# Altium PCB carrier_board.PcbDoc (part 17 of 18)
Units mm, origin at the board's own origin, x right, y up, seen from the top; angles counter-clockwise.
Board outline 146 x 102 mm, 20 copper layers (F.Cu, F.Mask, B.Cu, B.Mask, In1.Cu, F.SilkS, In2.Cu, B.SilkS, F.Adhes, B.Adhes, F.Paste, B.Paste, Dwgs.User, Cmts.User, Eco1.User, Eco2.User, Edge.Cuts, Margin, B.CrtYd, F.CrtYd); 256 components, 384 nets, 1262 pads, 1024 vias.
Unrouted connection lines stored in the file: 117.
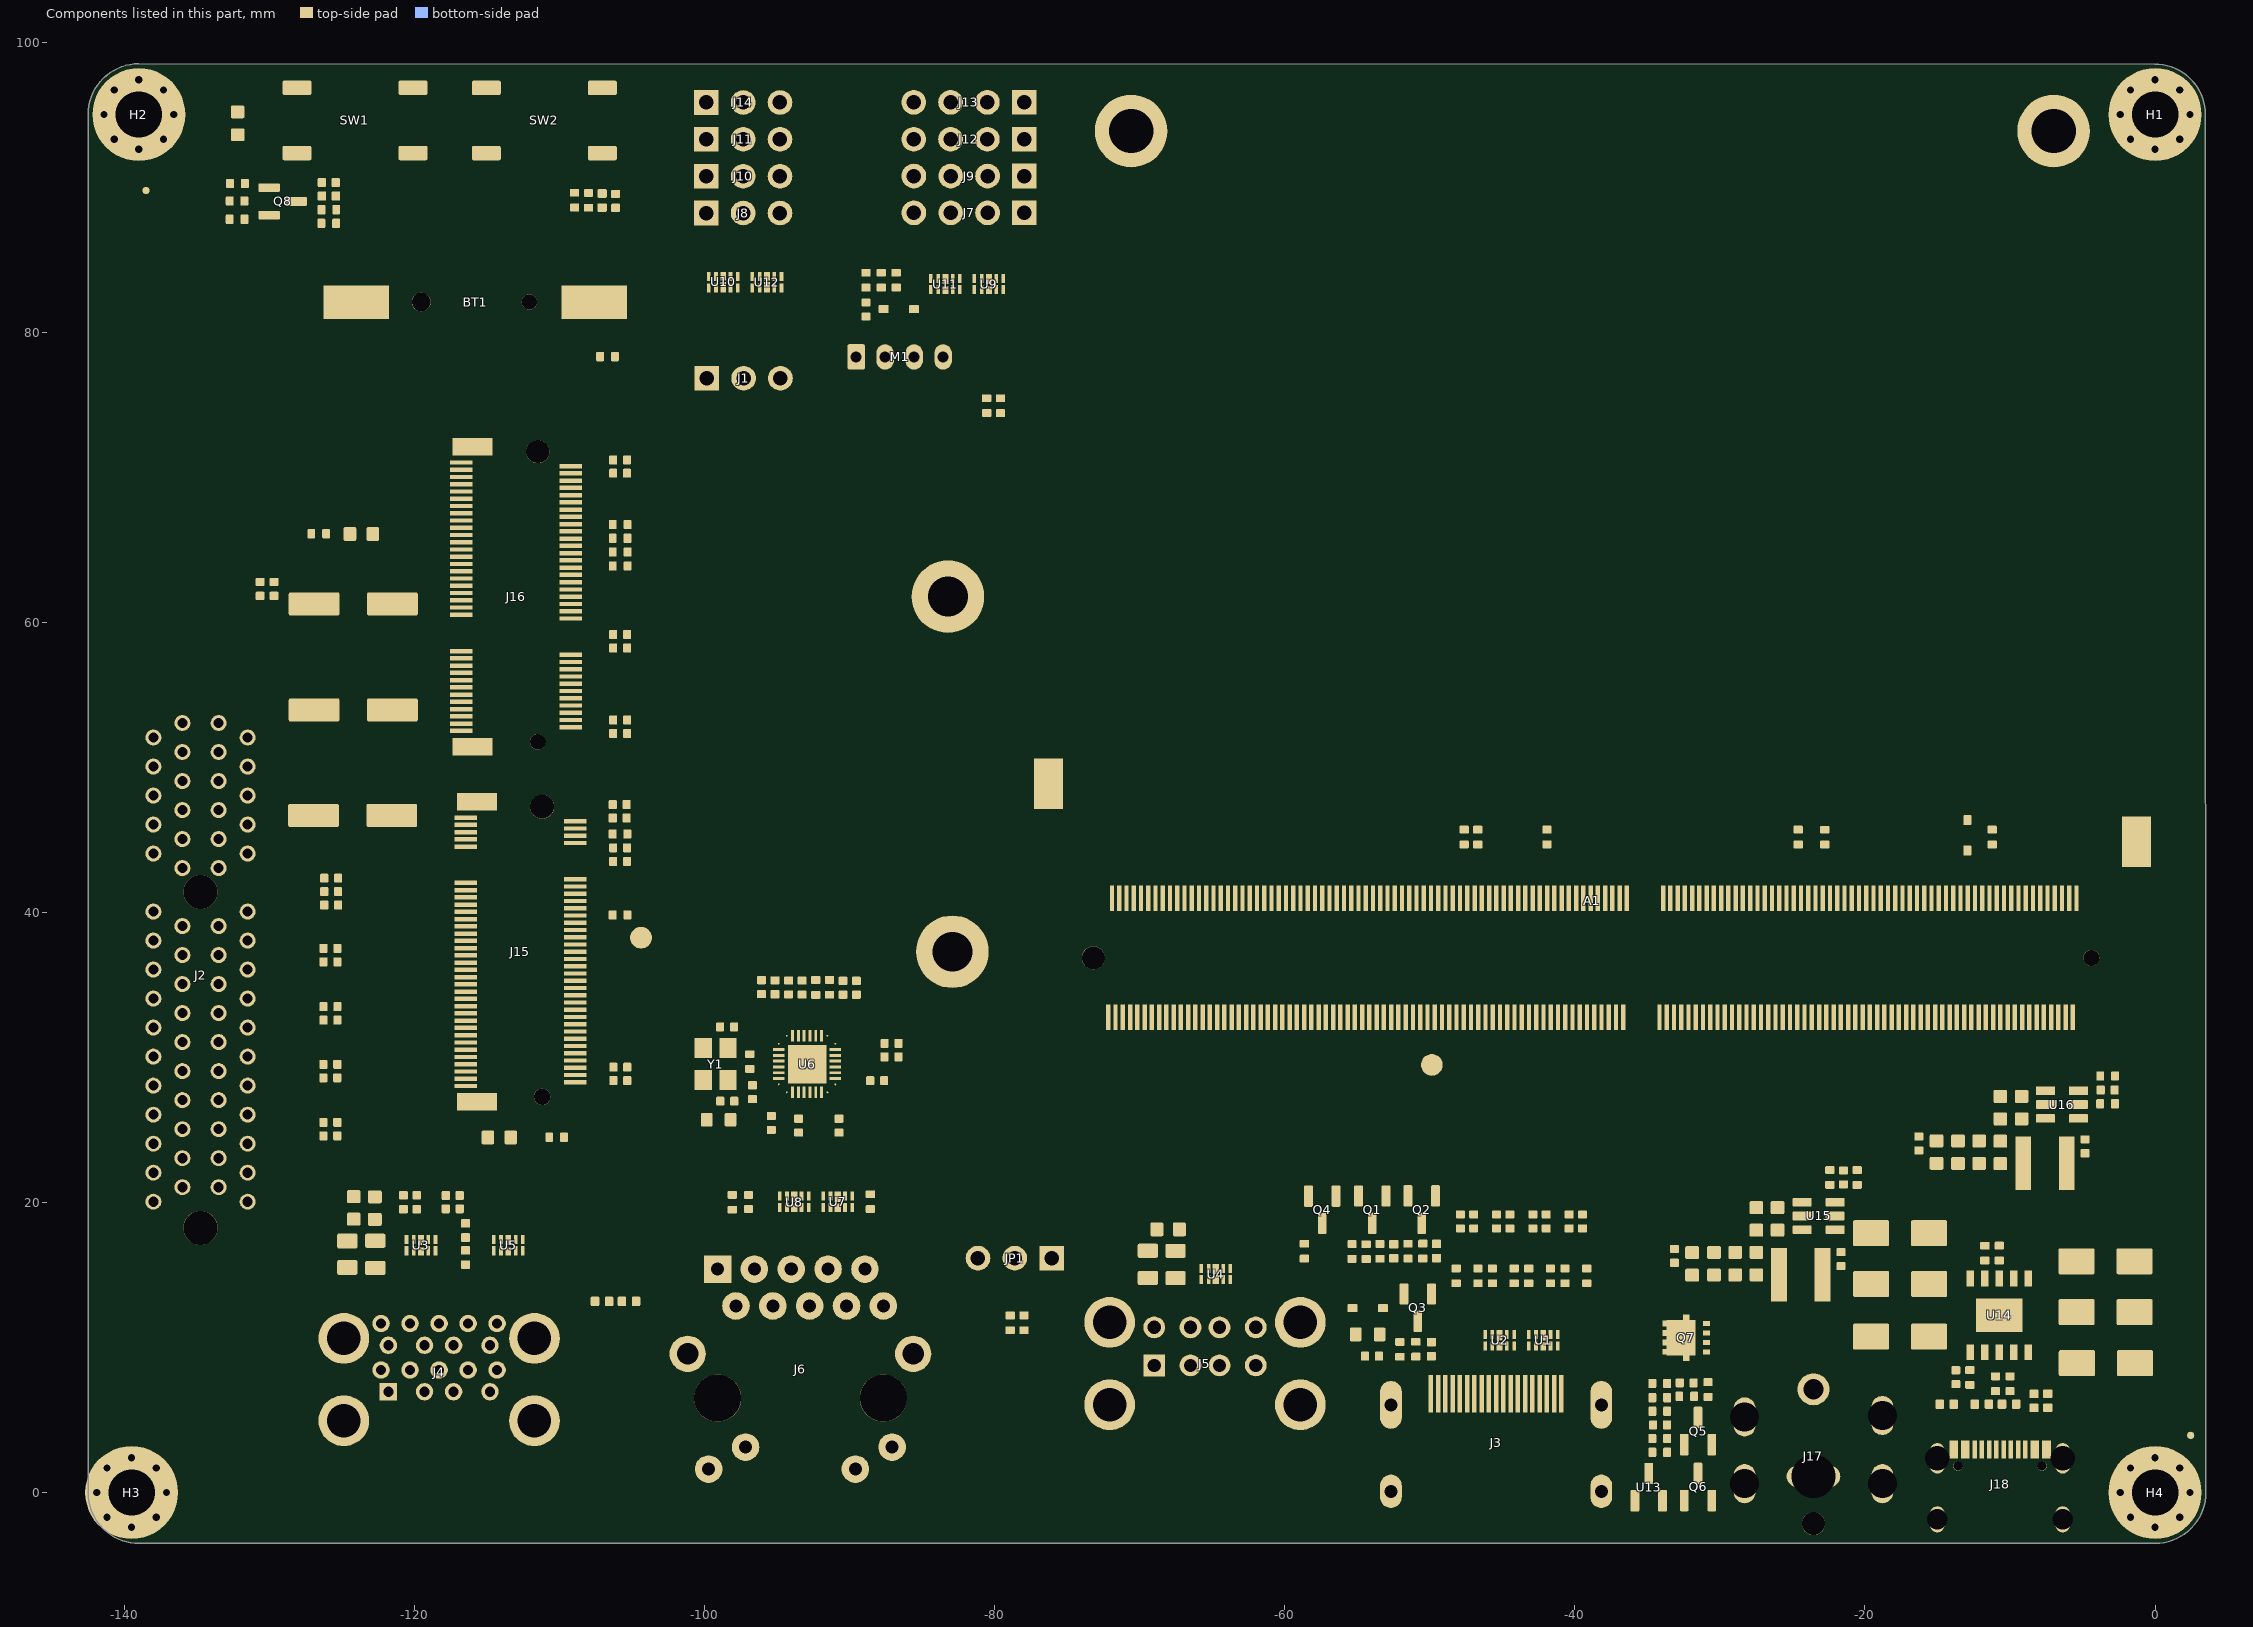
[diagram p27: the components of this part, seen from the top]

## Polygon pours and split planes (outlines as drawn) (continued)
CON_USB3_SSRX_P on F.Cu "F.Cu-/USB2.0&USB3.0/CON_USB3_SSRX_P" (solid, remove dead copper, pour order 32052): -114.331,17.007 -114.347,17.121 -114.363,17.188 -114.393,17.323 -114.405,17.462 -114.53,17.446 -114.578,17.133 -114.549,17.128 -114.528,17.115 -114.506,17.073 -114.501,17.013 -114.501,17.007
Net-(D21-A2) on F.Cu "F.Cu-Net-(D21-A2)" (solid, remove dead copper, pour order 31167): 18 vertices, not listed, extent -128.282,91.433 -127.033,92.341
CON_USB2_D_N on F.Cu "F.Cu-/USB2.0&USB3.0/CON_USB2_D_N" (solid, remove dead copper, pour order 31119): 20 vertices, not listed, extent -66.646,11.236 -65.551,12.26
HSIO_8_TX+ on F.Cu "F.Cu-/LattePanda Module/HSIO_8_TX+" (solid, remove dead copper, pour order 31953): -119.863,29.815 -119.701,29.806 -119.602,29.8 -119.461,29.819 -119.499,30.015 -119.611,30.181 -119.683,30.115 -119.712,30.072 -119.736,30.038 -119.764,30.01 -119.804,29.992 -119.863,29.985
GND on F.Cu "F.Cu-GND-3" (solid, remove dead copper, pour order 31338): -41.33,5.355 -41.332,5.381 -41.331,5.461 -41.315,5.492 -41.28,5.505 -41.43,6.806 -41.58,5.505 -41.557,5.5 -41.541,5.488 -41.527,5.443 -41.528,5.381 -41.53,5.355
Net-(D10-A2) on F.Cu "F.Cu-Net-(D10-A2)" (solid, remove dead copper, pour order 31716): -11.34,2.185 -11.342,2.211 -11.341,2.291 -11.325,2.322 -11.29,2.335 -11.44,2.956 -11.59,2.335 -11.567,2.33 -11.551,2.318 -11.537,2.273 -11.538,2.211 -11.54,2.185
TMDS_CK+ on F.Cu "F.Cu-/HDMI/TMDS_CK+" (solid, remove dead copper, pour order 32098): -45.587,9.673 -45.592,9.705 -45.6,9.766 -45.59,9.789 -45.565,9.797 -45.69,10.111 -45.815,9.797 -45.795,9.793 -45.784,9.78 -45.781,9.738 -45.788,9.705 -45.793,9.673
CON_USB4_D_P on F.Cu "F.Cu-/USB2.0&USB3.0/CON_USB4_D_P" (solid, remove dead copper, pour order 31405): -115.932,17.083 -116.044,17.057 -116.308,16.999 -116.441,16.981 -116.559,16.983 -116.481,16.688 -116.162,16.529 -116.156,16.649 -116.114,16.76 -116.042,16.851 -115.998,16.885 -115.953,16.907 -115.932,16.913
MDI2- on F.Cu "F.Cu-/Gigabit Ethernet/MDI2-" (solid, remove dead copper, pour order 32112): -91.968,27.107 -91.968,27.109 -91.958,27.162 -91.941,27.184 -91.909,27.19 -91.935,27.591 -92.035,27.6 -92.044,27.405 -92.065,27.258 -92.084,27.107
+5V on F.Cu "F.Cu-+5V" (solid, remove dead copper, pour order 31420): -86.59,82.53 -86.596,82.595 -86.605,82.67 -86.603,82.744 -86.578,82.803 -86.554,82.823 -86.52,82.833 -86.79,83.071 -87.06,82.833 -87.029,82.824 -87.006,82.808 -86.98,82.756 -86.976,82.668 -86.984,82.595 -86.99,82.53
TMDS_D2+ on F.Cu "F.Cu-/HDMI/TMDS_D2+" (solid, remove dead copper, pour order 31439): -39.517,13.902 -39.408,14.001 -39.264,14.1 -39.188,14.135 -39.112,14.156 -39.064,14.16 -39.184,14.431 -39.505,14.477 -39.493,14.385 -39.516,14.277 -39.578,14.154 -39.663,14.048
I2C2_SCL on F.Cu "F.Cu-/GPIO/I2C2_SCL" (solid, remove dead copper, pour order 32007): -82.475,82.33 -82.47,82.243 -82.455,82.179 -82.409,82.097 -82.377,82.058 -82.286,81.939 -82.12,82.049 -82.081,82.246 -82.179,82.251 -82.2,82.25 -82.25,82.249 -82.29,82.257 -82.316,82.281 -82.325,82.33
SLS_S3 on F.Cu "F.Cu-/LattePanda Module/SLS_S3" (solid, remove dead copper, pour order 31053): 23 vertices, not listed, extent -82.146,15.164 -80.984,16.326
+3V3 on F.Cu "F.Cu-+3V3-2" (solid, remove dead copper, pour order 31512): -106.86,71.065 -106.738,71.056 -106.667,71.04 -106.602,71.012 -106.564,70.984 -106.536,70.947 -106.523,70.91 -106.299,71.19 -106.523,71.47 -106.554,71.406 -106.618,71.359 -106.722,71.327 -106.86,71.315
+3V3 on F.Cu "F.Cu-+3V3-1" (solid, remove dead copper, pour order 31370): -106.1,52.67 -106.105,52.75 -106.112,52.846 -106.108,52.944 -106.082,53.03 -106.056,53.064 -106.02,53.09 -106.3,53.261 -106.58,53.09 -106.526,53.043 -106.495,52.967 -106.488,52.852 -106.495,52.75 -106.5,52.67
{\C\L\K\R\E\Q\E\}\ on F.Cu "F.Cu-/M.2 E&M Key/~{CLKREQE}" (solid, remove dead copper, pour order 31674): -115.845,65.61 -115.871,65.608 -115.951,65.609 -115.982,65.625 -115.995,65.66 -116.771,65.51 -115.995,65.36 -115.99,65.383 -115.978,65.399 -115.933,65.413 -115.871,65.412 -115.845,65.41
DDC_SCL on F.Cu "F.Cu-/HDMI/DDC_SCL" (solid, remove dead copper, pour order 31254): -50.435,17.535 -50.427,17.655 -50.394,17.795 -50.366,17.85 -50.328,17.895 -50.271,17.928 -50.56,18.573 -50.849,17.928 -50.784,17.888 -50.734,17.813 -50.699,17.697 -50.685,17.535
Net-(J16-SUSCLK) on F.Cu "F.Cu-Net-(J16-SUSCLK)" (solid, remove dead copper, pour order 31616): -106.87,64.66 -106.726,64.65 -106.646,64.631 -106.577,64.599 -106.547,64.572 -106.528,64.538 -106.329,64.84 -106.59,65.074 -106.611,64.995 -106.664,64.932 -106.751,64.884 -106.858,64.86 -106.87,64.86
+3V3 on F.Cu "F.Cu-+3V3" (solid, remove dead copper, pour order 31695): -98.165,21.06 -98.186,20.945 -98.212,20.88 -98.251,20.822 -98.286,20.788 -98.328,20.765 -98.36,20.757 -98.09,20.519 -97.82,20.757 -97.888,20.784 -97.948,20.846 -97.995,20.947 -98.015,21.06
GND on F.Cu "F.Cu-GND-2" (solid, remove dead copper, pour order 31667): -115.845,60.61 -115.871,60.608 -115.951,60.609 -115.982,60.625 -115.995,60.66 -116.771,60.51 -115.995,60.36 -115.99,60.383 -115.978,60.399 -115.933,60.413 -115.871,60.412 -115.845,60.41
TMDS_D0- on F.Cu "F.Cu-/HDMI/TMDS_D0-" (solid, remove dead copper, pour order 32083): -44.793,11.322 -44.788,11.29 -44.78,11.229 -44.79,11.206 -44.815,11.197 -44.69,10.884 -44.565,11.197 -44.585,11.202 -44.596,11.215 -44.599,11.257 -44.592,11.29 -44.587,11.322
HSIO_9_TX+ on F.Cu "F.Cu-/LattePanda Module/HSIO_9_TX+" (solid, remove dead copper, pour order 31945): -120.963,28.415 -120.801,28.406 -120.702,28.4 -120.561,28.419 -120.599,28.615 -120.711,28.781 -120.783,28.715 -120.812,28.672 -120.836,28.638 -120.864,28.61 -120.904,28.592 -120.963,28.585
FAN_1_TAC on F.Cu "F.Cu-/Fan_Temp/FAN_1_TAC" (solid, remove dead copper, pour order 31863): -71.279,42.409 -71.221,42.461 -71.172,42.492 -71.108,42.519 -71.044,42.545 -70.959,42.594 -71.069,42.761 -71.236,42.871 -71.301,42.749 -71.311,42.722 -71.345,42.644 -71.421,42.551
PWR_EN on F.Cu "F.Cu-/PSU/PWR_EN" (solid, remove dead copper, pour order 31884): -78.08,7.756 -78.085,7.686 -78.097,7.634 -78.132,7.562 -78.167,7.497 -78.196,7.399 -78,7.359 -77.804,7.399 -77.846,7.548 -77.87,7.632 -77.88,7.756
DDI_B_TX0+ on F.Cu "F.Cu-/HDMI/DDI_B_TX0+" (solid, remove dead copper, pour order 31454): -39.884,19.683 -39.862,19.612 -39.795,19.37 -39.777,19.248 -39.785,19.142 -39.475,19.169 -39.317,19.45 -39.434,19.463 -39.54,19.511 -39.627,19.588 -39.658,19.635 -39.678,19.68 -39.679,19.683
GND on F.Cu "F.Cu-GND-1" (solid, remove dead copper, pour order 31784): -66.565,34.384 -66.56,34.465 -66.548,34.522 -66.524,34.584 -66.498,34.648 -66.474,34.741 -66.67,34.781 -66.866,34.741 -66.826,34.613 -66.81,34.581 -66.779,34.503 -66.765,34.384
Net-(D9-K) on F.Cu "F.Cu-Net-(D9-K)" (solid, remove dead copper, pour order 31649): -109.845,30.18 -109.819,30.182 -109.739,30.181 -109.708,30.165 -109.695,30.13 -108.919,30.28 -109.695,30.43 -109.7,30.407 -109.712,30.391 -109.757,30.377 -109.819,30.378 -109.845,30.38
CON_USB3_SSTX_N on F.Cu "F.Cu-/USB2.0&USB3.0/CON_USB3_SSTX_N" (solid, remove dead copper, pour order 32044): -120.079,16.232 -120.079,16.238 -120.07,16.312 -120.047,16.344 -120.002,16.358 -120.05,16.671 -120.175,16.687 -120.187,16.548 -120.217,16.413 -120.239,16.316 -120.249,16.232
Net-(U6-CKXTAL1) on F.Cu "F.Cu-Net-(U6-CKXTAL1)" (solid, remove dead copper, pour order 31502): -96.377,29.838 -96.472,29.962 -96.516,30.045 -96.549,30.133 -96.562,30.201 -96.563,30.267 -96.56,30.286 -96.881,30.221 -96.989,29.95 -96.868,29.94 -96.723,29.891 -96.568,29.802 -96.483,29.731
GND on F.Cu "F.Cu-GND" (solid, remove dead copper, pour order 31095): 18 vertices, not listed, extent -62.624,10.147 -61.376,11.383
+3V3 on B.Cu "B.Cu-+3V3-15" (solid, remove dead copper, pour order 30978): -121.67,65.46 -118.39,65.46 -118.39,63.32 -121.67,63.32
HSIO_3_RX+ on B.Cu "B.Cu-/LattePanda Module/HSIO_3_RX+-1" (solid, remove dead copper, pour order 31217): -63.886,42.903 -63.891,42.852 -63.904,42.815 -63.948,42.769 -63.973,42.752 -64.027,42.714 -64.082,42.651 -63.916,42.539 -63.72,42.501 -63.704,42.606 -63.702,42.68 -63.707,42.741 -63.716,42.903
CON_USB3_SSTX_P on B.Cu "B.Cu-/USB2.0&USB3.0/CON_USB3_SSTX_P-1" (solid, remove dead copper, pour order 31034): 18 vertices, not listed, extent -122.417,8.333 -121.47,9.28
PWR_EN on B.Cu "B.Cu-/PSU/PWR_EN-1" (solid, remove dead copper, pour order 31016): 21 vertices, not listed, extent -78.624,5.999 -77.376,7.236
+3V3 on B.Cu "B.Cu-+3V3-14" (solid, remove dead copper, pour order 31175): -53.229,18.249 -53.171,18.301 -53.122,18.332 -53.058,18.359 -52.994,18.385 -52.909,18.434 -53.019,18.601 -53.186,18.711 -53.251,18.589 -53.261,18.562 -53.295,18.484 -53.371,18.391
HSIO_11_RX+ on B.Cu "B.Cu-/LattePanda Module/HSIO_11_RX+-1" (solid, remove dead copper, pour order 31327): -57.716,36.027 -57.707,36.189 -57.701,36.288 -57.72,36.429 -57.916,36.391 -58.082,36.279 -58.016,36.207 -57.973,36.178 -57.939,36.154 -57.911,36.126 -57.893,36.086 -57.886,36.027
Net-(A1-SIO_UART_RX) on B.Cu "B.Cu-Net-(A1-SIO_UART_RX)-1" (solid, remove dead copper, pour order 31106): -73.366,45.1 -73.288,45.095 -73.232,45.083 -73.167,45.057 -73.103,45.029 -73.009,45.004 -72.969,45.2 -73.009,45.396 -73.141,45.355 -73.167,45.343 -73.246,45.313 -73.366,45.3
HSIO_10_RX- on B.Cu "B.Cu-/LattePanda Module/HSIO_10_RX--1" (solid, remove dead copper, pour order 31251): -58.944,36.027 -58.939,36.078 -58.926,36.115 -58.882,36.161 -58.857,36.178 -58.803,36.216 -58.748,36.279 -58.914,36.391 -59.11,36.429 -59.126,36.324 -59.128,36.25 -59.123,36.189 -59.114,36.027
VDC on B.Cu "B.Cu-VDC-1" (solid, remove dead copper, pour order 30995): 17 vertices, not listed, extent -1.624,4.854 -0.167,6.16
CC2 on B.Cu "B.Cu-/PSU/CC2-1" (solid, remove dead copper, pour order 31079): -8.381,13.598 -8.446,13.669 -8.484,13.725 -8.508,13.771 -8.584,13.901 -8.751,13.791 -8.861,13.624 -8.731,13.548 -8.654,13.504 -8.558,13.421
HSIO_0_TX+ on B.Cu "B.Cu-/LattePanda Module/HSIO_0_TX+-1" (solid, remove dead copper, pour order 31271): -118.567,22.141 -118.618,22.146 -118.655,22.159 -118.701,22.203 -118.718,22.228 -118.756,22.282 -118.819,22.337 -118.931,22.171 -118.969,21.975 -118.864,21.959 -118.79,21.957 -118.729,21.962 -118.567,21.971
HSIO_2_TX+ on B.Cu "B.Cu-/LattePanda Module/HSIO_2_TX+-1" (solid, remove dead copper, pour order 31311): -101.103,44.031 -100.941,44.022 -100.842,44.016 -100.701,44.035 -100.739,44.231 -100.851,44.397 -100.923,44.331 -100.952,44.288 -100.976,44.254 -101.004,44.226 -101.044,44.208 -101.103,44.201
+3V3 on B.Cu "B.Cu-+3V3-13" (solid, remove dead copper, pour order 31163): -108.544,87.57 -108.622,87.575 -108.678,87.587 -108.743,87.613 -108.807,87.641 -108.901,87.666 -108.941,87.47 -108.901,87.274 -108.769,87.315 -108.743,87.327 -108.664,87.357 -108.544,87.37
+3V3 on B.Cu "B.Cu-+3V3-12" (solid, remove dead copper, pour order 31201): -79.02,73.909 -79.015,74.002 -79.003,74.066 -78.986,74.118 -78.945,74.266 -79.142,74.306 -79.338,74.266 -79.298,74.148 -79.273,74.103 -79.236,74.027 -79.224,73.977 -79.22,73.909
HSIO_0_TX- on B.Cu "B.Cu-/LattePanda Module/HSIO_0_TX--1" (solid, remove dead copper, pour order 31275): -79.883,21.699 -79.832,21.694 -79.795,21.681 -79.749,21.637 -79.732,21.612 -79.694,21.558 -79.631,21.503 -79.519,21.669 -79.481,21.865 -79.586,21.881 -79.66,21.883 -79.721,21.878 -79.883,21.869
Net-(JP1-C) on B.Cu "B.Cu-Net-(JP1-C)-1" (solid, remove dead copper, pour order 31184): -78.721,13.331 -78.779,13.279 -78.828,13.248 -78.892,13.221 -78.956,13.195 -79.041,13.146 -78.931,12.979 -78.764,12.869 -78.699,12.991 -78.689,13.018 -78.655,13.096 -78.579,13.189
+12VA on B.Cu "B.Cu-+12VA-1" (solid, remove dead copper, pour order 30963): -36.951,20.024 -33.394,20.024 -33.394,22.572 -36.941,22.572 -36.951,22.562
HSIO_9_RX- on B.Cu "B.Cu-/LattePanda Module/HSIO_9_RX--1" (solid, remove dead copper, pour order 31243): -60.444,36.027 -60.439,36.078 -60.426,36.115 -60.382,36.161 -60.357,36.178 -60.303,36.216 -60.248,36.279 -60.414,36.391 -60.61,36.429 -60.626,36.324 -60.628,36.25 -60.623,36.189 -60.614,36.027
HSIO_1_TX+ on B.Cu "B.Cu-/LattePanda Module/HSIO_1_TX+-1" (solid, remove dead copper, pour order 31237): -115.067,20.241 -115.118,20.246 -115.155,20.259 -115.201,20.303 -115.218,20.328 -115.256,20.382 -115.319,20.437 -115.431,20.271 -115.469,20.075 -115.364,20.059 -115.29,20.057 -115.229,20.062 -115.067,20.071
VDC on B.Cu "B.Cu-VDC" (solid, remove dead copper, pour order 30962): -20.86,22.28 -20.04,21.23 -4.81,21.2 -4.81,17.54 -20.899,17.54 -22.694,19.56 -29.07,19.537 -29.07,22.297
HSIO_2_RX- on B.Cu "B.Cu-/LattePanda Module/HSIO_2_RX--1" (solid, remove dead copper, pour order 31313): -99.113,42.831 -98.951,42.822 -98.852,42.816 -98.711,42.835 -98.749,43.031 -98.861,43.197 -98.933,43.131 -98.962,43.088 -98.986,43.054 -99.014,43.026 -99.054,43.008 -99.113,43.001
PWR_EN on B.Cu "B.Cu-/PSU/PWR_EN" (solid, remove dead copper, pour order 31148): -77.9,6.964 -77.895,7.042 -77.883,7.098 -77.857,7.163 -77.829,7.227 -77.804,7.321 -78,7.361 -78.196,7.321 -78.155,7.189 -78.143,7.163 -78.113,7.084 -78.1,6.964
VPullup on B.Cu "B.Cu-VPullup-1" (solid, remove dead copper, pour order 31139): -13.05,47.376 -13.055,47.298 -13.067,47.242 -13.093,47.177 -13.121,47.113 -13.146,47.019 -12.95,46.979 -12.754,47.019 -12.795,47.151 -12.807,47.177 -12.837,47.256 -12.85,47.376
HSIO_1_TX- on B.Cu "B.Cu-/LattePanda Module/HSIO_1_TX--1" (solid, remove dead copper, pour order 31259): -80.863,20.279 -80.812,20.274 -80.775,20.261 -80.729,20.217 -80.712,20.192 -80.674,20.138 -80.611,20.083 -80.499,20.249 -80.461,20.445 -80.566,20.461 -80.64,20.463 -80.701,20.458 -80.863,20.449
HPD on B.Cu "B.Cu-/HDMI/HPD-1" (solid, remove dead copper, pour order 31157): -52.86,15.064 -52.855,15.142 -52.843,15.198 -52.817,15.263 -52.789,15.327 -52.764,15.421 -52.96,15.461 -53.156,15.421 -53.115,15.289 -53.103,15.263 -53.073,15.184 -53.06,15.064
+5V on B.Cu "B.Cu-+5V-1" (solid, remove dead copper, pour order 30965): -33.033,15.1 -29.27,15.1 -29.27,13.952 -29.28,13.95 -32.89,13.95 -33.05,14.11 -33.05,15.01
SOC_UART2_RX on B.Cu "B.Cu-/GPIO/SOC_UART2_RX-1" (solid, remove dead copper, pour order 31357): -84.856,79.585 -84.788,79.58 -84.737,79.568 -84.663,79.53 -84.598,79.494 -84.499,79.464 -84.459,79.66 -84.499,79.856 -84.615,79.817 -84.663,79.79 -84.738,79.751 -84.789,79.739 -84.856,79.735
CON_USB3_SSRX_P on B.Cu "B.Cu-/USB2.0&USB3.0/CON_USB3_SSRX_P-1" (solid, remove dead copper, pour order 31040): 17 vertices, not listed, extent -116.417,8.333 -115.642,9.239
HSIO_11_TX- on B.Cu "B.Cu-/LattePanda Module/HSIO_11_TX-" (solid, remove dead copper, pour order 31257): -58.194,28.917 -58.189,28.968 -58.176,29.005 -58.132,29.051 -58.107,29.068 -58.053,29.106 -57.998,29.169 -58.164,29.281 -58.36,29.319 -58.376,29.214 -58.378,29.14 -58.373,29.079 -58.364,28.917
{\W\A\K\E\}\ on B.Cu "B.Cu-/~{WAKE}-3" (solid, remove dead copper, pour order 31121): -111.201,42.249 -111.149,42.191 -111.118,42.142 -111.091,42.078 -111.065,42.014 -111.016,41.929 -110.849,42.039 -110.739,42.206 -110.861,42.271 -110.888,42.281 -110.966,42.315 -111.059,42.391
FAN_1_PWM on B.Cu "B.Cu-/Fan_Temp/FAN_1_PWM-1" (solid, remove dead copper, pour order 31022): 20 vertices, not listed, extent -79.417,74.992 -78.264,76.001
SOC_UART2_RX on B.Cu "B.Cu-/GPIO/SOC_UART2_RX" (solid, remove dead copper, pour order 31359): -97.857,80.643 -97.902,80.695 -97.929,80.739 -97.955,80.818 -97.975,80.89 -98.024,80.981 -98.191,80.871 -98.301,80.704 -98.191,80.649 -98.138,80.635 -98.058,80.608 -98.014,80.581 -97.963,80.537
REFCLK2- on B.Cu "B.Cu-/LattePanda Module/REFCLK2--1" (solid, remove dead copper, pour order 31211): -46.843,35.899 -46.792,35.894 -46.755,35.881 -46.709,35.837 -46.692,35.812 -46.654,35.758 -46.591,35.703 -46.479,35.869 -46.441,36.065 -46.546,36.081 -46.62,36.083 -46.681,36.078 -46.843,36.069
FAN_1_TAC on B.Cu "B.Cu-/Fan_Temp/FAN_1_TAC-2" (solid, remove dead copper, pour order 31070): -86.391,82.37 -86.55,82.364 -86.675,82.342 -86.756,82.326 -86.611,81.59 -86.193,82.214 -86.249,82.23 -86.337,82.22 -86.387,82.203 -86.415,82.184 -86.415,82.175 -86.398,82.17 -86.391,82.17
HSIO_9_RX- on B.Cu "B.Cu-/LattePanda Module/HSIO_9_RX-" (solid, remove dead copper, pour order 31067): -132.3,30.14 -132.206,30.047 -132.087,29.924 -131.957,29.744 -131.499,30.049 -131.806,30.507 -131.891,30.431 -131.966,30.33 -132.014,30.264 -132.061,30.222 -132.087,30.213 -132.114,30.216 -132.18,30.26
HSIO_9_RX+ on B.Cu "B.Cu-/LattePanda Module/HSIO_9_RX+-1" (solid, remove dead copper, pour order 31323): -60.716,36.027 -60.707,36.189 -60.701,36.288 -60.72,36.429 -60.916,36.391 -61.082,36.279 -61.016,36.207 -60.973,36.178 -60.939,36.154 -60.911,36.126 -60.893,36.086 -60.886,36.027
+12V on B.Cu "B.Cu-+12V-3" (solid, remove dead copper, pour order 31004): -23.05,8.799 -23.065,9.125 -23.075,9.229 -23.088,9.356 -23.091,9.487 -23.079,9.645 -23.044,9.854 -23.78,10.001 -24.404,9.583 -24.243,9.365 -24.158,9.251 -24.098,9.139 -24.062,8.999 -24.05,8.799
+3V3 on B.Cu "B.Cu-+3V3-11" (solid, remove dead copper, pour order 31124): -49.951,18.529 -49.899,18.471 -49.868,18.422 -49.841,18.358 -49.815,18.294 -49.766,18.209 -49.599,18.319 -49.489,18.486 -49.611,18.551 -49.638,18.561 -49.716,18.595 -49.809,18.671
+3V3 on B.Cu "B.Cu-+3V3-10" (solid, remove dead copper, pour order 31181): -23.557,30.222 -23.615,30.17 -23.664,30.139 -23.728,30.112 -23.792,30.086 -23.877,30.037 -23.767,29.87 -23.6,29.76 -23.535,29.882 -23.525,29.909 -23.491,29.987 -23.415,30.08
HSIO_3_RX+ on B.Cu "B.Cu-/LattePanda Module/HSIO_3_RX+" (solid, remove dead copper, pour order 31291): -76.477,56.309 -76.639,56.318 -76.738,56.324 -76.879,56.305 -76.841,56.109 -76.729,55.943 -76.657,56.009 -76.628,56.052 -76.604,56.086 -76.576,56.114 -76.536,56.132 -76.477,56.139
REFCLK0- on B.Cu "B.Cu-/LattePanda Module/REFCLK0--1" (solid, remove dead copper, pour order 31349): -49.153,39.165 -49.274,39.057 -49.347,38.991 -49.434,38.879 -49.268,38.767 -49.071,38.729 -49.068,38.826 -49.077,38.877 -49.085,38.918 -49.084,38.958 -49.069,38.999 -49.032,39.045
REFCLK2+ on B.Cu "B.Cu-/LattePanda Module/REFCLK2+-1" (solid, remove dead copper, pour order 31233): -119.717,39.135 -119.768,39.14 -119.805,39.153 -119.851,39.197 -119.868,39.222 -119.906,39.276 -119.969,39.331 -120.081,39.165 -120.119,38.969 -120.014,38.953 -119.94,38.951 -119.879,38.956 -119.717,38.965
HSIO_2_RX+ on B.Cu "B.Cu-/LattePanda Module/HSIO_2_RX+-1" (solid, remove dead copper, pour order 31307): -112.673,38.331 -112.511,38.322 -112.412,38.316 -112.271,38.335 -112.309,38.531 -112.421,38.697 -112.493,38.631 -112.522,38.588 -112.546,38.554 -112.574,38.526 -112.614,38.508 -112.673,38.501
DDI_B_HPD on B.Cu "B.Cu-/HDMI/DDI_B_HPD-1" (solid, remove dead copper, pour order 31085): -30.224,30.915 -30.304,30.919 -30.362,30.931 -30.424,30.956 -30.488,30.981 -30.581,31.006 -30.621,30.81 -30.581,30.614 -30.446,30.655 -30.424,30.664 -30.345,30.693 -30.224,30.705
CON_USB4_D_N on B.Cu "B.Cu-/USB2.0&USB3.0/CON_USB4_D_N-1" (solid, remove dead copper, pour order 31375): -115.245,17.349 -115.269,17.332 -115.288,17.332 -115.313,17.362 -115.332,17.407 -115.374,17.496 -115.541,17.384 -115.501,17.188 -115.396,17.193 -115.323,17.179 -115.274,17.169 -115.228,17.168 -115.18,17.185 -115.125,17.228
{\P\L\T\_\R\S\T\}\ on B.Cu "B.Cu-/~{PLT_RST}-1" (solid, remove dead copper, pour order 31049): 18 vertices, not listed, extent -133.607,42.244 -132.694,43.157
+3V3 on B.Cu "B.Cu-+3V3-9" (solid, remove dead copper, pour order 31197): -131.329,90.881 -131.381,90.939 -131.412,90.988 -131.439,91.052 -131.465,91.116 -131.514,91.201 -131.681,91.091 -131.791,90.924 -131.669,90.859 -131.642,90.849 -131.564,90.815 -131.471,90.739
REFCLK0+ on B.Cu "B.Cu-/LattePanda Module/REFCLK0+-1" (solid, remove dead copper, pour order 31345): -59.827,48.129 -59.989,48.138 -60.088,48.144 -60.229,48.125 -60.191,47.929 -60.079,47.763 -60.007,47.829 -59.978,47.872 -59.954,47.906 -59.926,47.934 -59.886,47.952 -59.827,47.959
CON_USB3_SSTX_N on B.Cu "B.Cu-/USB2.0&USB3.0/CON_USB3_SSTX_N-1" (solid, remove dead copper, pour order 31031): 22 vertices, not listed, extent -120.888,8.449 -119.967,9.448
FAN_1_PWM on B.Cu "B.Cu-/Fan_Temp/FAN_1_PWM" (solid, remove dead copper, pour order 31127): -78.55,74.806 -78.555,74.728 -78.567,74.672 -78.593,74.607 -78.621,74.543 -78.646,74.449 -78.45,74.409 -78.254,74.449 -78.295,74.581 -78.307,74.607 -78.337,74.686 -78.35,74.806
GbE_PCIe_RX- on B.Cu "B.Cu-/Gigabit Ethernet/GbE_PCIe_RX--1" (solid, remove dead copper, pour order 31331): -80.441,44.257 -80.432,44.419 -80.426,44.518 -80.445,44.659 -80.641,44.621 -80.807,44.509 -80.741,44.437 -80.698,44.408 -80.664,44.384 -80.636,44.356 -80.618,44.316 -80.611,44.257
HSIO_0_TX+ on B.Cu "B.Cu-/LattePanda Module/HSIO_0_TX+" (solid, remove dead copper, pour order 31351): -79.883,21.971 -79.721,21.962 -79.622,21.956 -79.481,21.975 -79.519,22.171 -79.631,22.337 -79.703,22.271 -79.732,22.228 -79.756,22.194 -79.784,22.166 -79.824,22.148 -79.883,22.141
HSIO_0_TX- on B.Cu "B.Cu-/LattePanda Module/HSIO_0_TX-" (solid, remove dead copper, pour order 31343): -118.567,21.869 -118.729,21.878 -118.828,21.884 -118.969,21.865 -118.931,21.669 -118.819,21.503 -118.747,21.569 -118.718,21.612 -118.694,21.646 -118.666,21.674 -118.626,21.692 -118.567,21.699
HSIO_3_RX- on B.Cu "B.Cu-/LattePanda Module/HSIO_3_RX--1" (solid, remove dead copper, pour order 31277): -63.614,42.903 -63.623,42.741 -63.629,42.642 -63.61,42.501 -63.414,42.539 -63.248,42.651 -63.314,42.723 -63.357,42.752 -63.391,42.776 -63.419,42.804 -63.437,42.844 -63.444,42.903
{\P\L\T\_\R\S\T\}\ on B.Cu "B.Cu-/~{PLT_RST}" (solid, remove dead copper, pour order 31118): -111.691,41.409 -111.639,41.351 -111.608,41.302 -111.581,41.238 -111.555,41.174 -111.506,41.089 -111.339,41.199 -111.229,41.366 -111.351,41.431 -111.378,41.441 -111.456,41.475 -111.549,41.551
GbE_PCIe_RX+ on B.Cu "B.Cu-/Gigabit Ethernet/GbE_PCIe_RX+-1" (solid, remove dead copper, pour order 31249): -80.169,44.257 -80.164,44.308 -80.151,44.345 -80.107,44.391 -80.082,44.408 -80.028,44.446 -79.973,44.509 -80.139,44.621 -80.335,44.659 -80.351,44.554 -80.353,44.48 -80.348,44.419 -80.339,44.257
HSIO_11_RX- on B.Cu "B.Cu-/LattePanda Module/HSIO_11_RX--1" (solid, remove dead copper, pour order 31245): -57.444,36.027 -57.439,36.078 -57.426,36.115 -57.382,36.161 -57.357,36.178 -57.303,36.216 -57.248,36.279 -57.414,36.391 -57.61,36.429 -57.626,36.324 -57.628,36.25 -57.623,36.189 -57.614,36.027
Net-(Q7-G) on B.Cu "B.Cu-Net-(Q7-G)-1" (solid, remove dead copper, pour order 31130): -31.911,8.596 -31.916,8.518 -31.928,8.462 -31.954,8.397 -31.982,8.333 -32.007,8.239 -31.811,8.199 -31.615,8.239 -31.656,8.371 -31.668,8.397 -31.698,8.476 -31.711,8.596
HSIO_10_TX+ on B.Cu "B.Cu-/LattePanda Module/HSIO_10_TX+-1" (solid, remove dead copper, pour order 31329): -59.966,28.917 -59.957,29.079 -59.951,29.178 -59.97,29.319 -60.166,29.281 -60.332,29.169 -60.266,29.097 -60.223,29.068 -60.189,29.044 -60.161,29.016 -60.143,28.976 -60.136,28.917
HSIO_3_TX+ on B.Cu "B.Cu-/LattePanda Module/HSIO_3_TX+-1" (solid, remove dead copper, pour order 31223): -64.636,39.523 -64.641,39.472 -64.654,39.435 -64.698,39.389 -64.723,39.372 -64.777,39.334 -64.832,39.271 -64.666,39.159 -64.47,39.121 -64.454,39.226 -64.452,39.3 -64.457,39.361 -64.466,39.523
HSIO_10_RX- on B.Cu "B.Cu-/LattePanda Module/HSIO_10_RX-" (solid, remove dead copper, pour order 31037): 18 vertices, not listed, extent -132.538,25.593 -131.499,26.589
+3V3 on B.Cu "B.Cu-+3V3-8" (solid, remove dead copper, pour order 31094): -124.986,87.38 -124.908,87.375 -124.852,87.363 -124.787,87.337 -124.723,87.309 -124.629,87.284 -124.589,87.48 -124.629,87.676 -124.761,87.635 -124.787,87.623 -124.866,87.593 -124.986,87.58
CON_USB4_D_P on B.Cu "B.Cu-/USB2.0&USB3.0/CON_USB4_D_P-1" (solid, remove dead copper, pour order 31295): -115.177,17.083 -115.339,17.092 -115.438,17.097 -115.579,17.079 -115.541,16.883 -115.429,16.717 -115.357,16.783 -115.328,16.826 -115.304,16.86 -115.276,16.888 -115.236,16.906 -115.177,16.913
SOC_UART0_TX on B.Cu "B.Cu-/GPIO/SOC_UART0_TX-1" (solid, remove dead copper, pour order 30998): 21 vertices, not listed, extent -100.232,89.493 -98.623,91.102
{\W\A\K\E\}\ on B.Cu "B.Cu-/~{WAKE}-2" (solid, remove dead copper, pour order 31166): -117.674,43.21 -117.752,43.215 -117.808,43.227 -117.873,43.253 -117.937,43.281 -118.031,43.306 -118.071,43.11 -118.031,42.914 -117.899,42.955 -117.873,42.967 -117.794,42.997 -117.674,43.01
HSIO_1_TX+ on B.Cu "B.Cu-/LattePanda Module/HSIO_1_TX+" (solid, remove dead copper, pour order 31335): -80.863,20.551 -80.701,20.542 -80.602,20.536 -80.461,20.555 -80.499,20.751 -80.611,20.917 -80.683,20.851 -80.712,20.808 -80.736,20.774 -80.764,20.746 -80.804,20.728 -80.863,20.721
{\W\A\K\E\}\ on B.Cu "B.Cu-/~{WAKE}-1" (solid, remove dead copper, pour order 31046): 18 vertices, not listed, extent -136.107,42.943 -135.194,43.856
HSIO_10_TX+ on B.Cu "B.Cu-/LattePanda Module/HSIO_10_TX+" (solid, remove dead copper, pour order 31231): -122.037,25.571 -122.088,25.576 -122.125,25.589 -122.171,25.633 -122.188,25.658 -122.226,25.712 -122.289,25.767 -122.401,25.601 -122.439,25.405 -122.334,25.389 -122.26,25.387 -122.199,25.392 -122.037,25.401
CON_USB3_SSRX_P on B.Cu "B.Cu-/USB2.0&USB3.0/CON_USB3_SSRX_P" (solid, remove dead copper, pour order 31317): -114.331,15.127 -114.322,15.289 -114.316,15.388 -114.335,15.529 -114.531,15.491 -114.697,15.379 -114.631,15.307 -114.588,15.278 -114.554,15.254 -114.526,15.226 -114.508,15.186 -114.501,15.127
HSIO_3_RX- on B.Cu "B.Cu-/LattePanda Module/HSIO_3_RX-" (solid, remove dead copper, pour order 31235): -76.477,56.581 -76.528,56.586 -76.565,56.599 -76.611,56.643 -76.628,56.668 -76.666,56.722 -76.729,56.777 -76.841,56.611 -76.879,56.415 -76.774,56.399 -76.7,56.397 -76.639,56.402 -76.477,56.411
HSIO_10_TX- on B.Cu "B.Cu-/LattePanda Module/HSIO_10_TX--1" (solid, remove dead copper, pour order 31255): -59.694,28.917 -59.689,28.968 -59.676,29.005 -59.632,29.051 -59.607,29.068 -59.553,29.106 -59.498,29.169 -59.664,29.281 -59.86,29.319 -59.876,29.214 -59.878,29.14 -59.873,29.079 -59.864,28.917
GbE_PCIe_CLK- on B.Cu "B.Cu-/Gigabit Ethernet/GbE_PCIe_CLK--1" (solid, remove dead copper, pour order 31347): -49.295,43.257 -49.187,43.136 -49.121,43.063 -49.009,42.976 -48.897,43.142 -48.859,43.338 -48.956,43.342 -49.007,43.333 -49.048,43.325 -49.088,43.326 -49.129,43.341 -49.175,43.378
+3V3 on B.Cu "B.Cu-+3V3-7" (solid, remove dead copper, pour order 31369): -55.384,16.037 -55.424,15.991 -55.447,15.95 -55.467,15.866 -55.481,15.793 -55.526,15.701 -55.361,15.589 -55.164,15.629 -55.195,15.705 -55.233,15.756 -55.259,15.789 -55.274,15.822 -55.271,15.856 -55.243,15.896
+BATT on B.Cu "B.Cu-+BATT-1" (solid, remove dead copper, pour order 31361): -59.877,62.083 -59.922,62.135 -59.949,62.179 -59.975,62.258 -59.995,62.33 -60.044,62.421 -60.211,62.311 -60.321,62.144 -60.211,62.089 -60.158,62.075 -60.078,62.048 -60.034,62.021 -59.983,61.977
{\W\A\K\E\}\ on B.Cu "B.Cu-/~{WAKE}" (solid, remove dead copper, pour order 31103): -118.466,43.01 -118.388,43.005 -118.332,42.993 -118.267,42.967 -118.203,42.939 -118.109,42.914 -118.069,43.11 -118.109,43.306 -118.241,43.265 -118.267,43.253 -118.346,43.223 -118.466,43.21
HSIO_9_TX- on B.Cu "B.Cu-/LattePanda Module/HSIO_9_TX--1" (solid, remove dead copper, pour order 31263): -61.194,28.917 -61.189,28.968 -61.176,29.005 -61.132,29.051 -61.107,29.068 -61.053,29.106 -60.998,29.169 -61.164,29.281 -61.36,29.319 -61.376,29.214 -61.378,29.14 -61.373,29.079 -61.364,28.917
CON_USB4_D_P on B.Cu "B.Cu-/USB2.0&USB3.0/CON_USB4_D_P" (solid, remove dead copper, pour order 31213): -83.533,18.879 -83.482,18.874 -83.445,18.861 -83.399,18.817 -83.382,18.792 -83.344,18.738 -83.281,18.683 -83.169,18.849 -83.131,19.045 -83.236,19.061 -83.31,19.063 -83.371,19.058 -83.533,19.049
+15V on B.Cu "B.Cu-+15V-5" (solid, remove dead copper, pour order 30992): 17 vertices, not listed, extent -5.197,4.376 -3.854,5.791
USB_2_P7+ on B.Cu "B.Cu-/LattePanda Module/USB_2_P7+-1" (solid, remove dead copper, pour order 31203): -105.173,48.879 -105.122,48.874 -105.085,48.861 -105.039,48.817 -105.022,48.792 -104.984,48.738 -104.921,48.683 -104.809,48.849 -104.771,49.045 -104.876,49.061 -104.95,49.063 -105.011,49.058 -105.173,49.049
HSIO_3_TX- on B.Cu "B.Cu-/LattePanda Module/HSIO_3_TX--1" (solid, remove dead copper, pour order 31333): -64.364,39.523 -64.373,39.361 -64.379,39.262 -64.36,39.121 -64.164,39.159 -63.998,39.271 -64.064,39.343 -64.107,39.372 -64.141,39.396 -64.169,39.424 -64.187,39.464 -64.194,39.523
HSIO_10_RX+ on B.Cu "B.Cu-/LattePanda Module/HSIO_10_RX+-1" (solid, remove dead copper, pour order 31064): 18 vertices, not listed, extent -133.501,26.593 -132.461,27.507
HSIO_11_RX+ on B.Cu "B.Cu-/LattePanda Module/HSIO_11_RX+" (solid, remove dead copper, pour order 31061): 18 vertices, not listed, extent -133.501,22.593 -132.461,23.507
USB_2_P7- on B.Cu "B.Cu-/LattePanda Module/USB_2_P7--1" (solid, remove dead copper, pour order 31227): -114.647,53.481 -114.698,53.486 -114.735,53.499 -114.781,53.543 -114.798,53.568 -114.836,53.622 -114.899,53.677 -115.011,53.511 -115.049,53.315 -114.944,53.299 -114.87,53.297 -114.809,53.302 -114.647,53.311
HSIO_8_TX- on B.Cu "B.Cu-/LattePanda Module/HSIO_8_TX--1" (solid, remove dead copper, pour order 31373): -62.703,28.945 -62.698,28.991 -62.684,29.023 -62.639,29.057 -62.611,29.07 -62.529,29.114 -62.64,29.281 -62.836,29.319 -62.868,29.133 -62.873,28.945
HSIO_8_TX- on B.Cu "B.Cu-/LattePanda Module/HSIO_8_TX-" (solid, remove dead copper, pour order 31285): -119.137,29.713 -119.299,29.722 -119.398,29.728 -119.539,29.709 -119.501,29.513 -119.389,29.347 -119.317,29.413 -119.288,29.456 -119.264,29.49 -119.236,29.518 -119.196,29.536 -119.137,29.543
FAN_1_TAC on B.Cu "B.Cu-/Fan_Temp/FAN_1_TAC-1" (solid, remove dead copper, pour order 31109): -85.346,82.17 -85.268,82.165 -85.212,82.153 -85.147,82.127 -85.083,82.099 -84.989,82.074 -84.949,82.27 -84.989,82.466 -85.121,82.425 -85.147,82.413 -85.226,82.383 -85.346,82.37
GbE_PCIe_CLK+ on B.Cu "B.Cu-/Gigabit Ethernet/GbE_PCIe_CLK+-1" (solid, remove dead copper, pour order 31337): -64.817,38.369 -64.979,38.378 -65.078,38.384 -65.219,38.365 -65.181,38.169 -65.069,38.003 -64.997,38.069 -64.968,38.112 -64.944,38.146 -64.916,38.174 -64.876,38.192 -64.817,38.199
CC1 on B.Cu "B.Cu-/PSU/CC1-1" (solid, remove dead copper, pour order 31172): -9.949,15.449 -9.891,15.501 -9.842,15.532 -9.778,15.559 -9.714,15.585 -9.629,15.634 -9.739,15.801 -9.906,15.911 -9.971,15.789 -9.981,15.762 -10.015,15.684 -10.091,15.591
REFCLK2+ on B.Cu "B.Cu-/LattePanda Module/REFCLK2+" (solid, remove dead copper, pour order 31309): -46.843,36.171 -46.681,36.162 -46.582,36.156 -46.441,36.175 -46.479,36.371 -46.591,36.537 -46.663,36.471 -46.692,36.428 -46.716,36.394 -46.744,36.366 -46.784,36.348 -46.843,36.341
HSIO_2_TX- on B.Cu "B.Cu-/LattePanda Module/HSIO_2_TX--1" (solid, remove dead copper, pour order 31281): -65.864,37.713 -65.873,37.551 -65.879,37.452 -65.86,37.311 -65.664,37.349 -65.498,37.461 -65.564,37.533 -65.607,37.562 -65.641,37.586 -65.669,37.614 -65.687,37.654 -65.694,37.713
I2C3_SCL on B.Cu "B.Cu-/GPIO/I2C3_SCL-1" (solid, remove dead copper, pour order 31013): 23 vertices, not listed, extent -81.486,89.764 -80.324,90.926
I2C2_SCL on B.Cu "B.Cu-/GPIO/I2C2_SCL-1" (solid, remove dead copper, pour order 31355): -81.843,84.913 -81.895,84.868 -81.939,84.841 -82.018,84.815 -82.09,84.795 -82.181,84.746 -82.071,84.579 -81.904,84.469 -81.849,84.579 -81.835,84.632 -81.808,84.712 -81.781,84.756 -81.737,84.807
+3V3 on B.Cu "B.Cu-+3V3-6" (solid, remove dead copper, pour order 31199): -124.194,87.57 -124.267,87.575 -124.321,87.587 -124.39,87.618 -124.455,87.649 -124.551,87.676 -124.591,87.48 -124.551,87.284 -124.411,87.325 -124.396,87.331 -124.316,87.359 -124.194,87.37
GbE_PCIe_RX- on B.Cu "B.Cu-/Gigabit Ethernet/GbE_PCIe_RX-" (solid, remove dead copper, pour order 31219): -90.216,39.003 -90.221,38.952 -90.234,38.915 -90.278,38.869 -90.303,38.852 -90.357,38.814 -90.412,38.751 -90.246,38.639 -90.05,38.601 -90.034,38.706 -90.032,38.78 -90.037,38.841 -90.046,39.003
Net-(A1-SIO_UART_TX) on B.Cu "B.Cu-Net-(A1-SIO_UART_TX)-1" (solid, remove dead copper, pour order 31091): -73.619,44.771 -73.562,44.708 -73.529,44.657 -73.502,44.601 -73.474,44.54 -73.426,44.459 -73.259,44.569 -73.149,44.736 -73.264,44.796 -73.305,44.809 -73.383,44.839 -73.478,44.913
HSIO_8_RX+ on B.Cu "B.Cu-/LattePanda Module/HSIO_8_RX+-1" (solid, remove dead copper, pour order 31321): -62.216,36.027 -62.207,36.189 -62.201,36.288 -62.22,36.429 -62.416,36.391 -62.582,36.279 -62.516,36.207 -62.473,36.178 -62.439,36.154 -62.411,36.126 -62.393,36.086 -62.386,36.027
+12V on B.Cu "B.Cu-+12V-2" (solid, remove dead copper, pour order 30987): 18 vertices, not listed, extent -24.465,7.109 -22.635,8.689
CON_USB3_SSTX_N on B.Cu "B.Cu-/USB2.0&USB3.0/CON_USB3_SSTX_N" (solid, remove dead copper, pour order 31265): -120.079,15.447 -120.074,15.498 -120.061,15.535 -120.017,15.581 -119.992,15.598 -119.938,15.636 -119.883,15.699 -120.049,15.811 -120.245,15.849 -120.261,15.744 -120.263,15.67 -120.258,15.609 -120.249,15.447
HSIO_8_TX+ on B.Cu "B.Cu-/LattePanda Module/HSIO_8_TX+-1" (solid, remove dead copper, pour order 31371): -63.005,28.909 -63.009,29.031 -63.011,29.119 -62.994,29.241 -63.19,29.281 -63.356,29.169 -63.287,29.091 -63.257,29.068 -63.199,29.011 -63.182,28.97 -63.176,28.909
FAN_1_TAC on B.Cu "B.Cu-/Fan_Temp/FAN_1_TAC" (solid, remove dead copper, pour order 31193): -89.299,82.871 -89.351,82.929 -89.382,82.978 -89.409,83.042 -89.435,83.106 -89.484,83.191 -89.651,83.081 -89.761,82.914 -89.639,82.849 -89.612,82.839 -89.534,82.805 -89.441,82.729
HSIO_9_TX+ on B.Cu "B.Cu-/LattePanda Module/HSIO_9_TX+-1" (solid, remove dead copper, pour order 31339): -61.466,28.917 -61.457,29.079 -61.451,29.178 -61.47,29.319 -61.666,29.281 -61.832,29.169 -61.766,29.097 -61.723,29.068 -61.689,29.044 -61.661,29.016 -61.643,28.976 -61.636,28.917
HSIO_2_TX- on B.Cu "B.Cu-/LattePanda Module/HSIO_2_TX-" (solid, remove dead copper, pour order 31205): -101.103,43.759 -101.052,43.754 -101.015,43.741 -100.969,43.697 -100.952,43.672 -100.914,43.618 -100.851,43.563 -100.739,43.729 -100.701,43.925 -100.806,43.941 -100.88,43.943 -100.941,43.938 -101.103,43.929
SOC_UART0_TX on B.Cu "B.Cu-/GPIO/SOC_UART0_TX" (solid, remove dead copper, pour order 31353): -97.033,85.257 -96.988,85.205 -96.961,85.161 -96.935,85.082 -96.915,85.01 -96.866,84.919 -96.699,85.029 -96.589,85.196 -96.699,85.251 -96.752,85.265 -96.832,85.292 -96.876,85.319 -96.927,85.363
DDI_B_DDC_SDA on B.Cu "B.Cu-/HDMI/DDI_B_DDC_SDA" (solid, remove dead copper, pour order 31190): -51.889,17.941 -51.941,17.999 -51.972,18.048 -51.999,18.112 -52.025,18.176 -52.074,18.261 -52.241,18.151 -52.351,17.984 -52.229,17.919 -52.202,17.909 -52.124,17.875 -52.031,17.799
HSIO_1_TX- on B.Cu "B.Cu-/LattePanda Module/HSIO_1_TX-" (solid, remove dead copper, pour order 31303): -115.067,19.969 -115.229,19.978 -115.328,19.984 -115.469,19.965 -115.431,19.769 -115.319,19.603 -115.247,19.669 -115.218,19.712 -115.194,19.746 -115.166,19.774 -115.126,19.792 -115.067,19.799
USB_2_P7- on B.Cu "B.Cu-/LattePanda Module/USB_2_P7-" (solid, remove dead copper, pour order 31315): -105.173,49.151 -105.011,49.142 -104.912,49.136 -104.771,49.155 -104.809,49.351 -104.921,49.517 -104.993,49.451 -105.022,49.408 -105.046,49.374 -105.074,49.346 -105.114,49.328 -105.173,49.321
HSIO_3_TX- on B.Cu "B.Cu-/LattePanda Module/HSIO_3_TX-" (solid, remove dead copper, pour order 31239): -76.467,55.001 -76.518,55.006 -76.555,55.019 -76.601,55.063 -76.618,55.088 -76.656,55.142 -76.719,55.197 -76.831,55.031 -76.869,54.835 -76.764,54.819 -76.69,54.817 -76.629,54.822 -76.467,54.831
HSIO_2_RX- on B.Cu "B.Cu-/LattePanda Module/HSIO_2_RX-" (solid, remove dead copper, pour order 31207): -112.673,38.059 -112.622,38.054 -112.585,38.041 -112.539,37.997 -112.522,37.972 -112.484,37.918 -112.421,37.863 -112.309,38.029 -112.271,38.225 -112.376,38.241 -112.45,38.243 -112.511,38.238 -112.673,38.229
HPD on B.Cu "B.Cu-/HDMI/HPD" (solid, remove dead copper, pour order 31136): -50.435,8.796 -50.44,8.718 -50.452,8.662 -50.478,8.597 -50.506,8.533 -50.531,8.439 -50.335,8.399 -50.139,8.439 -50.18,8.571 -50.192,8.597 -50.222,8.676 -50.235,8.796
CON_USB3_D_N on B.Cu "B.Cu-/USB2.0&USB3.0/CON_USB3_D_N-1" (solid, remove dead copper, pour order 31279): -106.089,14.693 -106.098,14.531 -106.104,14.432 -106.085,14.291 -105.889,14.329 -105.723,14.441 -105.789,14.513 -105.832,14.542 -105.866,14.566 -105.894,14.594 -105.912,14.634 -105.919,14.693
HSIO_9_RX+ on B.Cu "B.Cu-/LattePanda Module/HSIO_9_RX+" (solid, remove dead copper, pour order 31055): 18 vertices, not listed, extent -133.501,30.593 -132.461,31.507
REFCLK0+ on B.Cu "B.Cu-/LattePanda Module/REFCLK0+" (solid, remove dead copper, pour order 31273): -49.345,39.358 -49.384,39.325 -49.42,39.309 -49.483,39.307 -49.513,39.313 -49.578,39.324 -49.661,39.318 -49.623,39.122 -49.511,38.956 -49.426,39.019 -49.372,39.07 -49.333,39.116 -49.225,39.237
CON_USB3_SSTX_P on B.Cu "B.Cu-/USB2.0&USB3.0/CON_USB3_SSTX_P" (solid, remove dead copper, pour order 31341): -120.351,15.447 -120.342,15.609 -120.336,15.708 -120.355,15.849 -120.551,15.811 -120.717,15.699 -120.651,15.627 -120.608,15.598 -120.574,15.574 -120.546,15.546 -120.528,15.506 -120.521,15.447
Net-(A1-SIO_UART_RX) on B.Cu "B.Cu-Net-(A1-SIO_UART_RX)" (solid, remove dead copper, pour order 31151): -88.637,61.752 -88.632,61.83 -88.62,61.886 -88.594,61.951 -88.566,62.015 -88.541,62.109 -88.737,62.149 -88.933,62.109 -88.892,61.978 -88.88,61.951 -88.85,61.872 -88.837,61.752
CON_USB3_SSRX_N on B.Cu "B.Cu-/USB2.0&USB3.0/CON_USB3_SSRX_N-1" (solid, remove dead copper, pour order 31253): -114.059,15.127 -114.054,15.178 -114.041,15.215 -113.997,15.261 -113.972,15.278 -113.918,15.316 -113.863,15.379 -114.029,15.491 -114.225,15.529 -114.241,15.424 -114.243,15.35 -114.238,15.289 -114.229,15.127
REFCLK0- on B.Cu "B.Cu-/LattePanda Module/REFCLK0-" (solid, remove dead copper, pour order 31269): -59.827,48.401 -59.878,48.406 -59.915,48.419 -59.961,48.463 -59.978,48.488 -60.016,48.542 -60.079,48.597 -60.191,48.431 -60.229,48.235 -60.124,48.219 -60.05,48.217 -59.989,48.222 -59.827,48.231
+3V3 on B.Cu "B.Cu-+3V3-5" (solid, remove dead copper, pour order 30970): -15.62,23.19 -16.5,23.98 -19.37,23.99 -19.37,21.46 -15.61,21.46
Net-(JP1-C) on B.Cu "B.Cu-Net-(JP1-C)" (solid, remove dead copper, pour order 31010): 22 vertices, not listed, extent -79.317,14.826 -77.903,16.161
HSIO_11_RX- on B.Cu "B.Cu-/LattePanda Module/HSIO_11_RX-" (solid, remove dead copper, pour order 31043): 20 vertices, not listed, extent -131.607,21.943 -130.762,22.863
HSIO_2_RX+ on B.Cu "B.Cu-/LattePanda Module/HSIO_2_RX+" (solid, remove dead copper, pour order 31209): -99.113,42.559 -99.062,42.554 -99.025,42.541 -98.979,42.497 -98.962,42.472 -98.924,42.418 -98.861,42.363 -98.749,42.529 -98.711,42.725 -98.816,42.741 -98.89,42.743 -98.951,42.738 -99.113,42.729
CON_USB3_D_P on B.Cu "B.Cu-/USB2.0&USB3.0/CON_USB3_D_P-1" (solid, remove dead copper, pour order 31297): -84.117,17.769 -84.279,17.778 -84.378,17.784 -84.519,17.765 -84.481,17.569 -84.369,17.403 -84.297,17.469 -84.268,17.512 -84.244,17.546 -84.216,17.574 -84.176,17.592 -84.117,17.599
GbE_PCIe_RX+ on B.Cu "B.Cu-/Gigabit Ethernet/GbE_PCIe_RX+" (solid, remove dead copper, pour order 31283): -89.944,39.003 -89.953,38.841 -89.959,38.742 -89.94,38.601 -89.744,38.639 -89.578,38.751 -89.644,38.823 -89.687,38.852 -89.721,38.876 -89.749,38.904 -89.767,38.944 -89.774,39.003
Net-(Q7-G) on B.Cu "B.Cu-Net-(Q7-G)" (solid, remove dead copper, pour order 31169): -31.119,12.039 -31.061,12.091 -31.012,12.122 -30.948,12.149 -30.884,12.175 -30.799,12.224 -30.909,12.391 -31.076,12.501 -31.141,12.379 -31.151,12.352 -31.185,12.274 -31.261,12.181
+15V on B.Cu "B.Cu-+15V-4" (solid, remove dead copper, pour order 30954): -15.42,3.77 -6.06,3.77 -6.06,5.45 -16.15,5.45 -16.15,4.5
HSIO_8_RX+ on B.Cu "B.Cu-/LattePanda Module/HSIO_8_RX+" (solid, remove dead copper, pour order 31052): 19 vertices, not listed, extent -132.559,35.593 -131.499,36.507
{\C\L\K\R\E\Q\E\}\ on B.Cu "B.Cu-/M.2 E&M Key/~{CLKREQE}-1" (solid, remove dead copper, pour order 31160): -114.684,65.61 -114.762,65.615 -114.818,65.627 -114.883,65.653 -114.947,65.681 -115.041,65.706 -115.081,65.51 -115.041,65.314 -114.909,65.355 -114.883,65.367 -114.804,65.397 -114.684,65.41
CC1 on B.Cu "B.Cu-/PSU/CC1" (solid, remove dead copper, pour order 31133): -13.37,6.486 -13.375,6.408 -13.387,6.352 -13.413,6.287 -13.441,6.223 -13.466,6.129 -13.27,6.089 -13.074,6.129 -13.115,6.261 -13.127,6.287 -13.157,6.366 -13.17,6.486
HSIO_9_TX+ on B.Cu "B.Cu-/LattePanda Module/HSIO_9_TX+" (solid, remove dead copper, pour order 31229): -120.237,28.585 -120.288,28.59 -120.325,28.603 -120.371,28.647 -120.388,28.672 -120.426,28.726 -120.489,28.781 -120.601,28.615 -120.639,28.419 -120.534,28.403 -120.46,28.401 -120.399,28.406 -120.237,28.415
HSIO_8_RX- on B.Cu "B.Cu-/LattePanda Module/HSIO_8_RX--1" (solid, remove dead copper, pour order 31058): 18 vertices, not listed, extent -133.501,34.593 -132.461,35.507
CON_USB4_D_N on B.Cu "B.Cu-/USB2.0&USB3.0/CON_USB4_D_N" (solid, remove dead copper, pour order 31305): -83.533,19.151 -83.371,19.142 -83.272,19.136 -83.131,19.155 -83.169,19.351 -83.281,19.517 -83.353,19.451 -83.382,19.408 -83.406,19.374 -83.434,19.346 -83.474,19.328 -83.533,19.321
USB_2_P7+ on B.Cu "B.Cu-/LattePanda Module/USB_2_P7+" (solid, remove dead copper, pour order 31301): -114.647,53.209 -114.809,53.218 -114.908,53.224 -115.049,53.205 -115.011,53.009 -114.899,52.843 -114.827,52.909 -114.798,52.952 -114.774,52.986 -114.746,53.014 -114.706,53.032 -114.647,53.039
CON_USB3_D_P on B.Cu "B.Cu-/USB2.0&USB3.0/CON_USB3_D_P" (solid, remove dead copper, pour order 31221): -106.361,14.693 -106.366,14.642 -106.379,14.605 -106.423,14.559 -106.448,14.542 -106.502,14.504 -106.557,14.441 -106.391,14.329 -106.195,14.291 -106.179,14.396 -106.177,14.47 -106.182,14.531 -106.191,14.693
VPullup on B.Cu "B.Cu-VPullup" (solid, remove dead copper, pour order 31025): 22 vertices, not listed, extent -13.624,46.98 -12.376,48.001
+15V on B.Cu "B.Cu-+15V-3" (solid, remove dead copper, pour order 31195): -8.659,16.301 -8.711,16.359 -8.742,16.408 -8.769,16.472 -8.795,16.536 -8.844,16.621 -9.011,16.511 -9.121,16.344 -8.999,16.279 -8.972,16.269 -8.894,16.235 -8.801,16.159
+3V3 on B.Cu "B.Cu-+3V3-4" (solid, remove dead copper, pour order 31073): -2.539,28.912 -2.474,28.841 -2.436,28.785 -2.412,28.739 -2.336,28.609 -2.169,28.719 -2.059,28.886 -2.189,28.962 -2.266,29.006 -2.362,29.089
HSIO_8_TX+ on B.Cu "B.Cu-/LattePanda Module/HSIO_8_TX+" (solid, remove dead copper, pour order 31241): -119.137,29.985 -119.188,29.99 -119.225,30.003 -119.271,30.047 -119.288,30.072 -119.326,30.126 -119.389,30.181 -119.501,30.015 -119.539,29.819 -119.434,29.803 -119.36,29.801 -119.299,29.806 -119.137,29.815
GbE_PCIe_CLK- on B.Cu "B.Cu-/Gigabit Ethernet/GbE_PCIe_CLK-" (solid, remove dead copper, pour order 31261): -64.817,38.641 -64.868,38.646 -64.905,38.659 -64.951,38.703 -64.968,38.728 -65.006,38.782 -65.069,38.837 -65.181,38.671 -65.219,38.475 -65.114,38.459 -65.04,38.457 -64.979,38.462 -64.817,38.471
+15V on B.Cu "B.Cu-+15V-2" (solid, remove dead copper, pour order 31088): -6.634,5.62 -6.639,5.581 -6.652,5.556 -6.694,5.536 -6.746,5.533 -6.822,5.527 -6.862,5.516 -6.901,5.496 -6.79,5.329 -6.624,5.219 -6.534,5.338 -6.491,5.394 -6.459,5.449 -6.44,5.52 -6.434,5.62
CON_USB3_SSRX_N on B.Cu "B.Cu-/USB2.0&USB3.0/CON_USB3_SSRX_N" (solid, remove dead copper, pour order 31028): 20 vertices, not listed, extent -115.239,8.117 -114.183,9.134
+15V on B.Cu "B.Cu-+15V-1" (solid, remove dead copper, pour order 31178): -13.381,5.111 -13.439,5.059 -13.488,5.028 -13.552,5.001 -13.616,4.975 -13.701,4.926 -13.591,4.759 -13.424,4.649 -13.359,4.771 -13.349,4.798 -13.315,4.876 -13.239,4.969
CON_USB3_D_N on B.Cu "B.Cu-/USB2.0&USB3.0/CON_USB3_D_N" (solid, remove dead copper, pour order 31225): -84.117,18.041 -84.168,18.046 -84.205,18.059 -84.251,18.103 -84.268,18.128 -84.306,18.182 -84.369,18.237 -84.481,18.071 -84.519,17.875 -84.414,17.859 -84.34,17.857 -84.279,17.862 -84.117,17.871
REFCLK2- on B.Cu "B.Cu-/LattePanda Module/REFCLK2-" (solid, remove dead copper, pour order 31293): -119.717,38.863 -119.879,38.872 -119.978,38.878 -120.119,38.859 -120.081,38.663 -119.969,38.497 -119.897,38.563 -119.868,38.606 -119.844,38.64 -119.816,38.668 -119.776,38.686 -119.717,38.693
HSIO_10_RX+ on B.Cu "B.Cu-/LattePanda Module/HSIO_10_RX+" (solid, remove dead copper, pour order 31325): -59.216,36.027 -59.207,36.189 -59.201,36.288 -59.22,36.429 -59.416,36.391 -59.582,36.279 -59.516,36.207 -59.473,36.178 -59.439,36.154 -59.411,36.126 -59.393,36.086 -59.386,36.027
HSIO_11_TX+ on B.Cu "B.Cu-/LattePanda Module/HSIO_11_TX+" (solid, remove dead copper, pour order 31319): -58.466,28.917 -58.457,29.079 -58.451,29.178 -58.47,29.319 -58.666,29.281 -58.832,29.169 -58.766,29.097 -58.723,29.068 -58.689,29.044 -58.661,29.016 -58.643,28.976 -58.636,28.917
GbE_PCIe_CLK+ on B.Cu "B.Cu-/Gigabit Ethernet/GbE_PCIe_CLK+" (solid, remove dead copper, pour order 31267): -49.488,43.065 -49.455,43.026 -49.439,42.99 -49.437,42.927 -49.443,42.897 -49.454,42.832 -49.448,42.749 -49.252,42.787 -49.086,42.899 -49.149,42.984 -49.2,43.038 -49.246,43.077 -49.367,43.185
Net-(A1-SIO_UART_TX) on B.Cu "B.Cu-Net-(A1-SIO_UART_TX)" (solid, remove dead copper, pour order 31145): -89.15,62.364 -89.145,62.442 -89.133,62.498 -89.107,62.563 -89.079,62.627 -89.054,62.721 -89.25,62.761 -89.446,62.721 -89.405,62.589 -89.393,62.563 -89.363,62.484 -89.35,62.364
+12V on B.Cu "B.Cu-+12V-1" (solid, remove dead copper, pour order 31187): -34.951,3.103 -35.009,3.051 -35.058,3.02 -35.122,2.993 -35.186,2.967 -35.271,2.919 -35.161,2.752 -34.994,2.641 -34.929,2.763 -34.919,2.791 -34.885,2.868 -34.809,2.962
+15V on B.Cu "B.Cu-+15V" (solid, remove dead copper, pour order 31142): -12.62,6.544 -12.615,6.622 -12.603,6.678 -12.577,6.743 -12.549,6.807 -12.524,6.901 -12.72,6.941 -12.916,6.901 -12.875,6.769 -12.863,6.743 -12.833,6.664 -12.82,6.544
+3V3 on B.Cu "B.Cu-+3V3-3" (solid, remove dead copper, pour order 31112): -51.851,15.829 -51.799,15.771 -51.768,15.722 -51.741,15.658 -51.715,15.594 -51.666,15.509 -51.499,15.619 -51.389,15.786 -51.511,15.851 -51.538,15.861 -51.616,15.895 -51.709,15.971
+3V3 on B.Cu "B.Cu-+3V3-2" (solid, remove dead copper, pour order 31367): -52.711,18.91 -52.78,18.905 -52.83,18.893 -52.9,18.859 -52.963,18.825 -53.059,18.796 -53.021,18.6 -52.854,18.489 -52.82,18.567 -52.81,18.61 -52.802,18.65 -52.787,18.682 -52.759,18.703 -52.711,18.71
+12V on B.Cu "B.Cu-+12V" (solid, remove dead copper, pour order 31154): -32.71,5.446 -32.705,5.524 -32.693,5.581 -32.667,5.645 -32.639,5.709 -32.614,5.803 -32.81,5.843 -33.006,5.803 -32.965,5.672 -32.953,5.645 -32.923,5.566 -32.91,5.446
+BATT on B.Cu "B.Cu-+BATT" (solid, remove dead copper, pour order 31363): -43.745,37.756 -43.75,37.688 -43.762,37.637 -43.8,37.563 -43.836,37.498 -43.866,37.399 -43.67,37.359 -43.474,37.399 -43.513,37.515 -43.54,37.563 -43.579,37.638 -43.591,37.689 -43.595,37.756
HSIO_2_TX+ on B.Cu "B.Cu-/LattePanda Module/HSIO_2_TX+" (solid, remove dead copper, pour order 31215): -66.136,37.713 -66.141,37.662 -66.154,37.625 -66.198,37.579 -66.223,37.562 -66.277,37.524 -66.332,37.461 -66.166,37.349 -65.97,37.311 -65.954,37.416 -65.952,37.49 -65.957,37.551 -65.966,37.713
HSIO_3_TX+ on B.Cu "B.Cu-/LattePanda Module/HSIO_3_TX+" (solid, remove dead copper, pour order 31287): -76.467,54.729 -76.629,54.738 -76.728,54.744 -76.869,54.725 -76.831,54.529 -76.719,54.363 -76.647,54.429 -76.618,54.472 -76.594,54.506 -76.566,54.534 -76.526,54.552 -76.467,54.559
+3V3 on B.Cu "B.Cu-+3V3-1" (solid, remove dead copper, pour order 31100): -109.336,87.37 -109.258,87.365 -109.202,87.353 -109.137,87.327 -109.073,87.299 -108.979,87.274 -108.939,87.47 -108.979,87.666 -109.111,87.625 -109.137,87.613 -109.216,87.583 -109.336,87.57
+3V3 on B.Cu "B.Cu-+3V3" (solid, remove dead copper, pour order 31007): 24 vertices, not listed, extent -101.23,94.98 -99.879,96.68
HSIO_10_TX- on B.Cu "B.Cu-/LattePanda Module/HSIO_10_TX-" (solid, remove dead copper, pour order 31299): -122.037,25.299 -122.199,25.308 -122.298,25.314 -122.439,25.296 -122.401,25.099 -122.289,24.933 -122.217,25 -122.188,25.042 -122.164,25.077 -122.136,25.104 -122.096,25.122 -122.037,25.129